# Altium PCB Obscurum-MB_1a.PcbDoc
Units mm, origin at the board's own origin, x right, y up, seen from the top; angles counter-clockwise.
Board outline 100 x 100 mm, 2 copper layers (Top Layer, Bottom Layer), stack 1.535 mm thick; 144 components, 92 nets, 337 pads, 30 vias.
Unrouted connection lines stored in the file: 158.
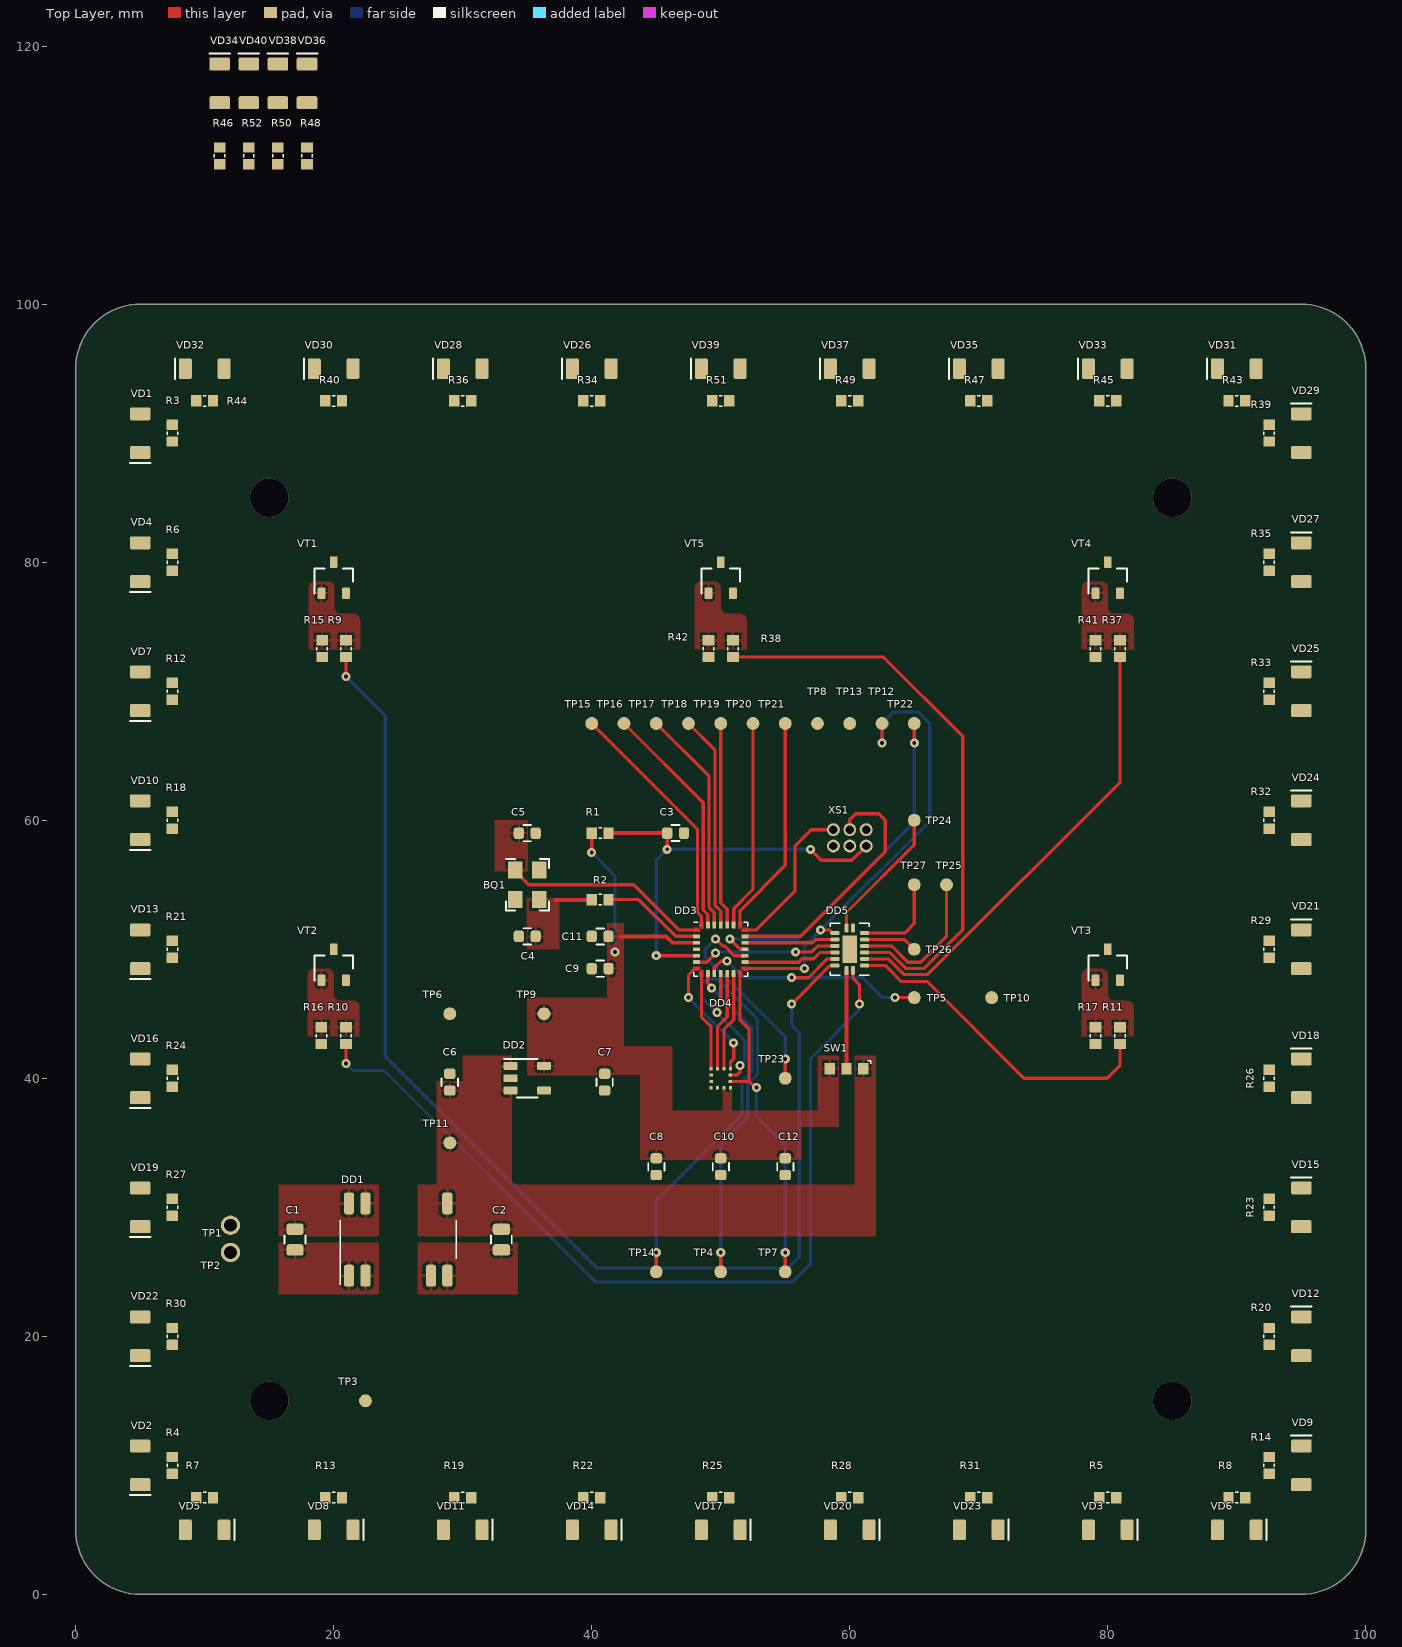
[diagram p0: Top Layer view]
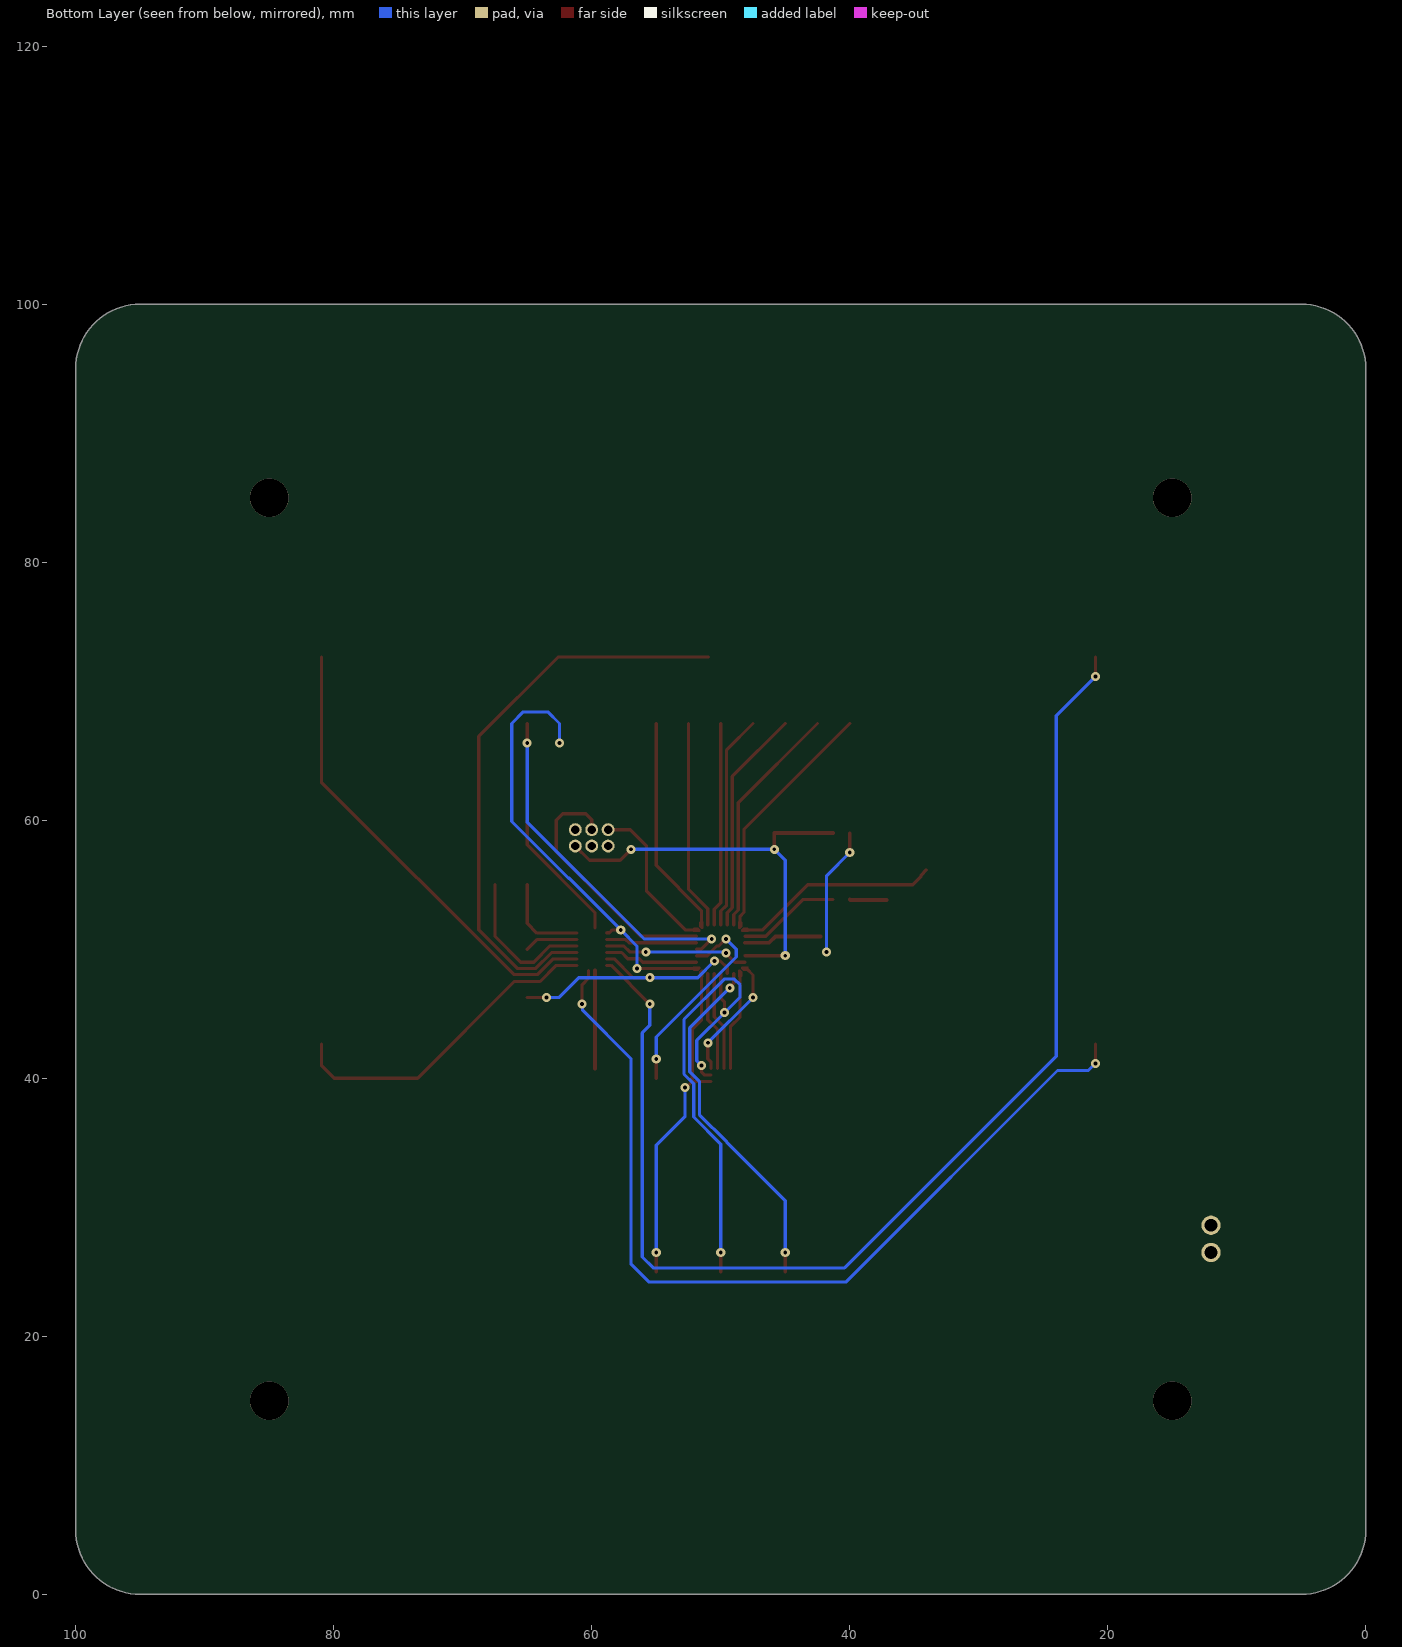
[diagram p1: Bottom Layer view, seen from below]

## Layer stack, top to bottom
Top Solder: solder mask 0.0254, SM-001, Dk 4
Top Layer: signal copper 0.018
Dielectric 1: core 1.4986, Core-043, Dk 4.3
Bottom Layer: signal copper 0.018
Bottom Solder: solder mask 0.0254, SM-001, Dk 4

## Board outline
0,5 ccw(c5,5) 5,0 95,0 ccw(c95,5) 100,5 100,95 ccw(c95,95) 95,100 5,100 ccw(c5,95) 0,95

## Design rules (kind name [scope] priority, off if disabled: settings)
AcuteAngle [All] p1: minimum=3.50000000000000E+0001 checktracksonly=FALSE
BoardOutlineClearance "BoardOutlineClearance 1" [All] p1: gap=0.25 ignorepadtopadclearanceinfootprint=FALSE except(0: Arc-SplitContinuation Track-SplitContinuation SMDPad-SplitContinuation THPad-SplitContinuation Via-SplitContinuation Fill-SplitContinuation Poly-SplitContinuation Region-SplitContinuation Text-SplitContinuation) // Milling
BoardOutlineClearance "BoardOutlineClearance 2" [All] p2: gap=0.4 ignorepadtopadclearanceinfootprint=FALSE except(0: Arc-SplitContinuation Track-SplitContinuation SMDPad-SplitContinuation THPad-SplitContinuation Via-SplitContinuation Fill-SplitContinuation Poly-SplitContinuation Region-SplitContinuation Text-SplitContinuation) // V-Cut
Clearance "Clearance-1 1 Oz" [All] p1: gap=0.2 ignorepadtopadclearanceinfootprint=TRUE except(0.25: Arc-Hole Track-Hole SMDPad-Hole THPad-Hole Via-Hole Fill-Hole Poly-Hole Region-Hole Text-Hole) // Standart
Clearance "Clearance-1 1/2 Oz" [All] p2: gap=0.125 ignorepadtopadclearanceinfootprint=FALSE except(0.2: Arc-Fill Arc-Poly Track-Fill Track-Poly SMDPad-SMDPad SMDPad-Fill SMDPad-Poly THPad-Fill THPad-Poly Via-Fill Via-Poly Fill-Fill Fill-Poly Poly-Poly Poly-Region Poly-Text; 0.25: Arc-Hole Track-Hole SMDPad-Hole THPad-Hole Via-Hole Fill-Hole Poly-Hole Region-Hole Text-Hole) // Standart
ComponentClearance [All] p1: gap=0.254 collisioncheckmode=3 verticalgap=0.254 showdistances=FALSE donotcheckwithout3dbody=TRUE
DiffPairsRouting "DiffPairsRouting 1 Oz" [All] p1: maxlimit=0.254 minlimit=0.2 mostfreqgap=0.254 toplayer_minwidth=0.2 toplayer_maxwidth=0.381 toplayer_prefwidth=0.381 bottomlayer_minwidth=0.2 bottomlayer_maxwidth=0.381 bottomlayer_prefwidth=0.381 maxuncoupledlength=12.7
DiffPairsRouting "DiffPairsRouting 1/2 Oz" [All] p2: maxlimit=0.254 minlimit=0.1 mostfreqgap=0.254 toplayer_minwidth=0.1 toplayer_maxwidth=0.381 toplayer_prefwidth=0.381 bottomlayer_minwidth=0.1 bottomlayer_maxwidth=0.381 bottomlayer_prefwidth=0.381 maxuncoupledlength=12.7
HoleSize "Minimum HoleSize" [IsPad] p1: absolutevalues=TRUE maxlimit=5.9 minlimit=0.6 maxpercent=80.000 minpercent=20.000
HoleSize "Minimum HoleSize VIA 1" [IsVia] p2: absolutevalues=TRUE maxlimit=5.9 minlimit=0.3 maxpercent=80.000 minpercent=20.000 // Standart
HoleToHoleClearance Hole2HoleClearance [All] p1: gap=0.25 allowstackedmicrovias=FALSE
MinimumAnnularRing "Minimum AR VIA Standart" [IsVia] p1: minimumring=0.15
MinimumAnnularRing "Minimum AR PAD Standart" [IsPAD] p2: minimumring=0.2
MinimumAnnularRing "Minimum AR VIA Advance" [IsVia] p3: minimumring=0.1
MinimumAnnularRing "Minimum AR PAD Advance" [IsPAD] p4: minimumring=0.15
MinimumSolderMaskSliver "SolderMask Bridge Standart" [All] p1: minsoldermaskwidth=0.15 // All Masks
MinimumSolderMaskSliver "SolderMask Bridge Advance" [All] p2: minsoldermaskwidth=0.1 // Mask LDI
PlaneClearance "PlaneClearance 1 Oz" [All] p1: clearance=0.2
PlaneClearance "PlaneClearance-1 1/2 Oz" [All] p2: clearance=0.2 // Standart
PlaneConnect "TermalConnect-1 1 Oz" [All] p1: planeconnectstyle=Relief reliefexpansion=0.2 reliefentries=4 reliefconductorwidth=0.2 reliefairgap=0.2 // Standart
PolygonConnect "PolygonConnect-1 1 Oz" [All] p1: thpad.connectstyle=Relief thpad.reliefconductorwidth=0.2 thpad.reliefentries=4 thpad.polygonreliefangle="90 Angle" thpad.airgapwidth=0.2 smdpad.connectstyle=Relief smdpad.reliefconductorwidth=0.2 smdpad.reliefentries=4 smdpad.polygonreliefangle="90 Angle" smdpad.airgapwidth=0.2 via.connectstyle=Direct via.reliefconductorwidth=0.254 via.reliefentries=4 via.polygonreliefangle="90 Angle" via.airgapwidth=0.254 // Standart
PolygonConnect "PolygonConnect-1 1/2 Oz" [All] p2: thpad.connectstyle=Relief thpad.reliefconductorwidth=0.15 thpad.reliefentries=4 thpad.polygonreliefangle="90 Angle" thpad.airgapwidth=0.2 smdpad.connectstyle=Relief smdpad.reliefconductorwidth=0.2 smdpad.reliefentries=4 smdpad.polygonreliefangle="90 Angle" smdpad.airgapwidth=0.2 via.connectstyle=Direct via.reliefconductorwidth=0.254 via.reliefentries=4 via.polygonreliefangle="90 Angle" via.airgapwidth=0.254 // Standart
RoutingCorners [All] p1 off: cornerstyle=45-Degree minsetback=2.54 maxsetback=2.54
RoutingVias [All] p1: holewidth=0.3 width=0.6 viastyle="Through Hole" minholewidth=0.2 minwidth=0.4 maxholewidth=5.9 maxwidth=6.4
SilkToSilkClearance Silk2SilkClearance [All] p1 off: silktosilkclearance=0.15
SilkToSolderMaskClearance Silk2SolderMaskClearance [IsPad] p1 off: minsilkscreentomaskgap=0.15 clearancetoexposedcopper=TRUE
SolderMaskExpansion SolderMaskExpansion-1 [All] p1: expansion=0.05 istentingtop=FALSE // Standart
SolderMaskExpansion "SolderMaskExpansion LDI" [All] p2: expansion=0.025 istentingtop=FALSE // Advance
UnRoutedNet [All] p1: checkbadconnections=TRUE
Width "Width 1 Oz" [All] p1: maxlimit=10 minlimit=0.15 preferedwidth=0.2 checkconnectedcopper=TRUE
Width "Width 1/2 Oz" [All] p2: maxlimit=10 minlimit=0.1 preferedwidth=0.125 checkconnectedcopper=TRUE
19 further rules are at their usual default settings.

## Classes and differential pairs
component class Obscurum-MB_1a: BQ1 C1 C2 C3 C4 C5 C6 C7 C8 C9 C10 C11 C12 DD1 DD2 DD3 DD4 R1 R2 TP1 TP2 TP3 TP4 TP5 TP6 TP7 TP8 TP9 TP10 TP11 TP12 TP13 TP14 TP15 TP16 TP17 TP18 TP19 TP20 TP21 TP22 TP23 XS1
component class LED: DD5 R3 R4 R5 R6 R7 R8 R9 R10 R11 R12 R13 R14 R15 R16 R17 R18 R19 R20 R21 R22 R23 R24 R25 R26 R27 R28 R29 R30 R31 R32 R33 R34 R35 R36 R37 R38 R39 R40 R41 R42 R43 R44 R45 R46 R47 R48 R49 R50 R51 R52 SW1 TP24 TP25 TP26 TP27 VD1 VD2 VD3 VD4 VD5 VD6 VD7 VD8 VD9 VD10 VD11 VD12 VD13 VD14 VD15 VD16 VD17 VD18 VD19 VD20 VD21 VD22 VD23 VD24 VD25 VD26 VD27 VD28 VD29 VD30 VD31 VD32 VD33 VD34 VD35 VD36 VD37 VD38 VD39 VD40 VT1 VT2 VT3 VT4 VT5

## Components (designator, comment, footprint, x,y, rotation, side; value= is the part's Value field where it differs from the comment)
BQ1 "SMD3225-16.000MHz" "OSC: 3225" 35,55 r270 top
C1 "Ceramic capacitor, 4.7u, X7R, ±10%, 50V, 0805, -55...+125°C" "CAP: 0805" 17,27.5 r90 top value=4.7u
C2 "Ceramic capacitor, 10u, X7R, ±10%, 50V, 0805, -55...+125°C" "CAP: 0805" 33,27.5 r90 top value=10u
C3 "Ceramic capacitor, 0.1uF, X7R, ±10%, 16V, 0603, -55...+125°C" "CAP: 0603" 46.5,59 r180 top value=0.1uF
C4 "0603   20 пФ ± 10 % X7R 10В" "CAP: 0603" 35,51 r180 top value=20p
C5 "0603   20 пФ ± 10 % X7R 10В" "CAP: 0603" 35,59 r0 top value=20p
C6 "0603   1 мкФ ± 10 % X7R 16В" "CAP: 0603" 29,39.7 r270 top value=1u
C7 "0603   1 мкФ ± 10 % X7R 16В" "CAP: 0603" 41,39.7 r90 top value=1u
C8 "Ceramic capacitor, 0.1uF, X7R, ±10%, 16V, 0603, -55...+125°C" "CAP: 0603" 45,33.15 r90 top value=0.1uF
C9 "Ceramic capacitor, 0.1uF, X7R, ±10%, 16V, 0603, -55...+125°C" "CAP: 0603" 40.65,48.5 r0 top value=0.1uF
C10 "Ceramic capacitor, 0.1uF, X7R, ±10%, 16V, 0603, -55...+125°C" "CAP: 0603" 50,33.15 r90 top value=0.1uF
C11 "Ceramic capacitor, 4.7u, X7R, ±10%, 16V, 0603, -55...+125°C" "CAP: 0603" 40.65,51 r0 top value=4.7u
C12 "Ceramic capacitor, 10uF, X7R, ±10%, 16V, 0603, -55...+125°C" "CAP: 0603" 55,33.15 r90 top value=10uF
DD1 "B0505MT-1WR4" B0505MT-1WR4 25,27.5 r90 top
DD2 "LP5907MFX-3.3" SOT23-5 35,40 r0 top
DD3 "STM32G031G8U6" 28-UFQFPN 50,50 r0 top locked
DD4 "LIS2DH12TR" 12-LGA 50,40 r270 top
DD5 "74HC595BQ" 16-DHVQFN 60,50 r180 top
R1 "Resistor film, 10k, , 0603, 0.1W, -55...+125°C" "RES: 0603" 40.65,59 r180 top value=10k
R2 "0603 62 Ом ± 5 %" "RES: 0603" 40.65,53.85 r180 top value=62
R3 "Resistor film, 150, , 0603, 0.1W, -55...+125°C" "RES: 0603" 7.5,90 r270 top value=150
R4 "Resistor film, 150, , 0603, 0.1W, -55...+125°C" "RES: 0603" 7.5,10 r270 top value=150
R5 "Resistor film, 150, , 0603, 0.1W, -55...+125°C" "RES: 0603" 80,7.5 r0 top value=150
R6 "Resistor film, 150, , 0603, 0.1W, -55...+125°C" "RES: 0603" 7.5,80 r270 top value=150
R7 "Resistor film, 150, , 0603, 0.1W, -55...+125°C" "RES: 0603" 10,7.5 r0 top value=150
R8 "Resistor film, 150, , 0603, 0.1W, -55...+125°C" "RES: 0603" 90,7.5 r0 top value=150
R9 "Resistor film, 100, , 0603, 0.1W, -55...+125°C" "RES: 0603" 20.95,73.3 r90 top value=100
R10 "Resistor film, 100, , 0603, 0.1W, -55...+125°C" "RES: 0603" 20.95,43.3 r90 top value=100
R11 "Resistor film, 100, , 0603, 0.1W, -55...+125°C" "RES: 0603" 80.95,43.3 r90 top value=100
R12 "Resistor film, 150, , 0603, 0.1W, -55...+125°C" "RES: 0603" 7.5,70 r270 top value=150
R13 "Resistor film, 150, , 0603, 0.1W, -55...+125°C" "RES: 0603" 20,7.5 r0 top value=150
R14 "Resistor film, 150, , 0603, 0.1W, -55...+125°C" "RES: 0603" 92.5,10 r90 top value=150
R15 "Resistor film, 10k, , 0603, 0.1W, -55...+125°C" "RES: 0603" 19.1,73.3 r90 top value=10k
R16 "Resistor film, 10k, , 0603, 0.1W, -55...+125°C" "RES: 0603" 19.05,43.3 r90 top value=10k
R17 "Resistor film, 10k, , 0603, 0.1W, -55...+125°C" "RES: 0603" 79.05,43.3 r90 top value=10k
R18 "Resistor film, 150, , 0603, 0.1W, -55...+125°C" "RES: 0603" 7.5,60 r270 top value=150
R19 "Resistor film, 150, , 0603, 0.1W, -55...+125°C" "RES: 0603" 30,7.5 r0 top value=150
R20 "Resistor film, 150, , 0603, 0.1W, -55...+125°C" "RES: 0603" 92.5,20 r90 top value=150
R21 "Resistor film, 150, , 0603, 0.1W, -55...+125°C" "RES: 0603" 7.5,50 r270 top value=150
R22 "Resistor film, 150, , 0603, 0.1W, -55...+125°C" "RES: 0603" 40,7.5 r0 top value=150
R23 "Resistor film, 150, , 0603, 0.1W, -55...+125°C" "RES: 0603" 92.5,30 r90 top value=150
R24 "Resistor film, 150, , 0603, 0.1W, -55...+125°C" "RES: 0603" 7.5,40 r270 top value=150
R25 "Resistor film, 150, , 0603, 0.1W, -55...+125°C" "RES: 0603" 50,7.5 r0 top value=150
R26 "Resistor film, 150, , 0603, 0.1W, -55...+125°C" "RES: 0603" 92.5,40 r90 top value=150
R27 "Resistor film, 150, , 0603, 0.1W, -55...+125°C" "RES: 0603" 7.5,30 r270 top value=150
R28 "Resistor film, 150, , 0603, 0.1W, -55...+125°C" "RES: 0603" 60,7.5 r0 top value=150
R29 "Resistor film, 150, , 0603, 0.1W, -55...+125°C" "RES: 0603" 92.5,50 r90 top value=150
R30 "Resistor film, 150, , 0603, 0.1W, -55...+125°C" "RES: 0603" 7.5,20 r270 top value=150
R31 "Resistor film, 150, , 0603, 0.1W, -55...+125°C" "RES: 0603" 70,7.5 r0 top value=150
R32 "Resistor film, 150, , 0603, 0.1W, -55...+125°C" "RES: 0603" 92.5,60 r90 top value=150
R33 "Resistor film, 150, , 0603, 0.1W, -55...+125°C" "RES: 0603" 92.5,70 r90 top value=150
R34 "Resistor film, 150, , 0603, 0.1W, -55...+125°C" "RES: 0603" 40,92.5 r180 top value=150
R35 "Resistor film, 150, , 0603, 0.1W, -55...+125°C" "RES: 0603" 92.5,80 r90 top value=150
R36 "Resistor film, 150, , 0603, 0.1W, -55...+125°C" "RES: 0603" 30,92.5 r180 top value=150
R37 "Resistor film, 100, , 0603, 0.1W, -55...+125°C" "RES: 0603" 80.95,73.3 r90 top value=100
R38 "Resistor film, 100, , 0603, 0.1W, -55...+125°C" "RES: 0603" 50.95,73.3 r90 top value=100
R39 "Resistor film, 150, , 0603, 0.1W, -55...+125°C" "RES: 0603" 92.5,90 r90 top value=150
R40 "Resistor film, 150, , 0603, 0.1W, -55...+125°C" "RES: 0603" 20,92.5 r180 top value=150
R41 "Resistor film, 10k, , 0603, 0.1W, -55...+125°C" "RES: 0603" 79.05,73.3 r90 top value=10k
R42 "Resistor film, 10k, , 0603, 0.1W, -55...+125°C" "RES: 0603" 49.05,73.3 r90 top value=10k
R43 "Resistor film, 150, , 0603, 0.1W, -55...+125°C" "RES: 0603" 90,92.5 r180 top value=150
R44 "Resistor film, 150, , 0603, 0.1W, -55...+125°C" "RES: 0603" 10,92.5 r180 top value=150
R45 "Resistor film, 150, , 0603, 0.1W, -55...+125°C" "RES: 0603" 80,92.5 r180 top value=150
R46 "Resistor film, 150, , 0603, 0.1W, -55...+125°C" "RES: 0603" 11.161,111.5 r270 top value=150
R47 "Resistor film, 150, , 0603, 0.1W, -55...+125°C" "RES: 0603" 70,92.5 r180 top value=150
R48 "Resistor film, 150, , 0603, 0.1W, -55...+125°C" "RES: 0603" 17.935,111.5 r270 top value=150
R49 "Resistor film, 150, , 0603, 0.1W, -55...+125°C" "RES: 0603" 60,92.5 r180 top value=150
R50 "Resistor film, 150, , 0603, 0.1W, -55...+125°C" "RES: 0603" 15.677,111.5 r270 top value=150
R51 "Resistor film, 150, , 0603, 0.1W, -55...+125°C" "RES: 0603" 50,92.5 r180 top value=150
R52 "Resistor film, 150, , 0603, 0.1W, -55...+125°C" "RES: 0603" 13.419,111.5 r270 top value=150
SW1 "Jumper" "JUM: 0603_3P" 60.4,40.75 r180 top
TP1 "Testpoint_HS1mm" "TestPoint(without 3D)" 12,28.608 r270 top
TP2 "Testpoint_HS1mm" "TestPoint(without 3D)" 12,26.5 r270 top
TP3 "Testpoint_HS1mm" "TestPoint(without hole)" 22.46,15 r0 top
TP4 "Testpoint_HS1mm" "TestPoint(without hole)" 50,25 r0 top
TP5 "Testpoint_HS1mm" "TestPoint(without hole)" 65,46.25 r180 top
TP6 "Testpoint_HS1mm" "TestPoint(without hole)" 29,45 r0 top
TP7 "Testpoint_HS1mm" "TestPoint(without hole)" 55,25 r0 top
TP8 "Testpoint_HS1mm" "TestPoint(without hole)" 57.5,67.5 r180 top
TP9 "Testpoint_HS1mm" "TestPoint(without hole)" 36.3,45 r0 top
TP10 "Testpoint_HS1mm" "TestPoint(without hole)" 71,46.25 r0 top
TP11 "Testpoint_HS1mm" "TestPoint(without hole)" 29,35 r0 top
TP12 "Testpoint_HS1mm" "TestPoint(without hole)" 62.5,67.5 r0 top
TP13 "Testpoint_HS1mm" "TestPoint(without hole)" 60,67.5 r180 top
TP14 "Testpoint_HS1mm" "TestPoint(without hole)" 45,25 r0 top
TP15 "Testpoint_HS1mm" "TestPoint(without hole)" 40,67.5 r0 top
TP16 "Testpoint_HS1mm" "TestPoint(without hole)" 42.5,67.5 r0 top
TP17 "Testpoint_HS1mm" "TestPoint(without hole)" 45,67.5 r0 top
TP18 "Testpoint_HS1mm" "TestPoint(without hole)" 47.5,67.5 r0 top
TP19 "Testpoint_HS1mm" "TestPoint(without hole)" 50,67.5 r0 top
TP20 "Testpoint_HS1mm" "TestPoint(without hole)" 52.5,67.5 r0 top
TP21 "Testpoint_HS1mm" "TestPoint(without hole)" 55,67.5 r0 top
TP22 "Testpoint_HS1mm" "TestPoint(without hole)" 65,67.5 r0 top
TP23 "Testpoint_HS1mm" "TestPoint(without hole)" 55,40 r0 top
TP24 "Testpoint_HS1mm" "TestPoint(without hole)" 65,60 r0 top
TP25 "Testpoint_HS1mm" "TestPoint(without hole)" 67.5,55 r0 top
TP26 "Testpoint_HS1mm" "TestPoint(without hole)" 65,50 r0 top
TP27 "Testpoint_HS1mm" "TestPoint(without hole)" 65,55 r0 top
VD1 "LED, Green, *, *, *, -55...+150°C" "LED: 1206Y" 5,90 r270 top
VD2 "LED, Green, *, *, *, -55...+150°C" "LED: 1206Y" 5,10 r270 top
VD3 "LED, Green, *, *, *, -55...+150°C" "LED: 1206Y" 80,5 r0 top
VD4 "LED, Green, *, *, *, -55...+150°C" "LED: 1206Y" 5,80 r270 top
VD5 "LED, Green, *, *, *, -55...+150°C" "LED: 1206Y" 10,5 r0 top
VD6 "LED, Green, *, *, *, -55...+150°C" "LED: 1206Y" 90,5 r0 top
VD7 "LED, Green, *, *, *, -55...+150°C" "LED: 1206Y" 5,70 r270 top
VD8 "LED, Green, *, *, *, -55...+150°C" "LED: 1206Y" 20,5 r0 top
VD9 "LED, Green, *, *, *, -55...+150°C" "LED: 1206Y" 95,10 r90 top
VD10 "LED, Green, *, *, *, -55...+150°C" "LED: 1206Y" 5,60 r270 top
VD11 "LED, Green, *, *, *, -55...+150°C" "LED: 1206Y" 30,5 r0 top
VD12 "LED, Green, *, *, *, -55...+150°C" "LED: 1206Y" 95,20 r90 top
VD13 "LED, Green, *, *, *, -55...+150°C" "LED: 1206Y" 5,50 r270 top
VD14 "LED, Green, *, *, *, -55...+150°C" "LED: 1206Y" 40,5 r0 top
VD15 "LED, Green, *, *, *, -55...+150°C" "LED: 1206Y" 95,30 r90 top
VD16 "LED, Green, *, *, *, -55...+150°C" "LED: 1206Y" 5,40 r270 top
VD17 "LED, Green, *, *, *, -55...+150°C" "LED: 1206Y" 50,5 r0 top
VD18 "LED, Green, *, *, *, -55...+150°C" "LED: 1206Y" 95,40 r90 top
VD19 "LED, Green, *, *, *, -55...+150°C" "LED: 1206Y" 5,30 r270 top
VD20 "LED, Green, *, *, *, -55...+150°C" "LED: 1206Y" 60,5 r0 top
VD21 "LED, Green, *, *, *, -55...+150°C" "LED: 1206Y" 95,50 r90 top
VD22 "LED, Green, *, *, *, -55...+150°C" "LED: 1206Y" 5,20 r270 top
VD23 "LED, Green, *, *, *, -55...+150°C" "LED: 1206Y" 70,5 r0 top
VD24 "LED, Green, *, *, *, -55...+150°C" "LED: 1206Y" 95,60 r90 top
VD25 "LED, Green, *, *, *, -55...+150°C" "LED: 1206Y" 95,70 r90 top
VD26 "LED, Green, *, *, *, -55...+150°C" "LED: 1206Y" 40,95 r180 top
VD27 "LED, Green, *, *, *, -55...+150°C" "LED: 1206Y" 95,80 r90 top
VD28 "LED, Green, *, *, *, -55...+150°C" "LED: 1206Y" 30,95 r180 top
VD29 "LED, Green, *, *, *, -55...+150°C" "LED: 1206Y" 95,90 r90 top
VD30 "LED, Green, *, *, *, -55...+150°C" "LED: 1206Y" 20,95 r180 top
VD31 "LED, Green, *, *, *, -55...+150°C" "LED: 1206Y" 90,95 r180 top
VD32 "LED, Green, *, *, *, -55...+150°C" "LED: 1206Y" 10,95 r180 top
VD33 "LED, Green, *, *, *, -55...+150°C" "LED: 1206Y" 80,95 r180 top
VD34 "LED, Green, *, *, *, -55...+150°C" "LED: 1206Y" 11.161,117.117 r90 top
VD35 "LED, Green, *, *, *, -55...+150°C" "LED: 1206Y" 70,95 r180 top
VD36 "LED, Green, *, *, *, -55...+150°C" "LED: 1206Y" 17.935,117.117 r90 top
VD37 "LED, Green, *, *, *, -55...+150°C" "LED: 1206Y" 60,95 r180 top
VD38 "LED, Green, *, *, *, -55...+150°C" "LED: 1206Y" 15.677,117.117 r90 top
VD39 "LED, Green, *, *, *, -55...+150°C" "LED: 1206Y" 50,95 r180 top
VD40 "LED, Green, *, *, *, -55...+150°C" "LED: 1206Y" 13.419,117.117 r90 top
VT1 "MOSFET N-channel transistor, 80V, 7A, 9.1nC, 2.5W, 34mOhm, 756pF, 8-TDSON, -55...+150°C" SOT23 20,78.8 r90 top
VT2 "MOSFET N-channel transistor, 80V, 7A, 9.1nC, 2.5W, 34mOhm, 756pF, 8-TDSON, -55...+150°C" SOT23 20,48.8 r90 top
VT3 "MOSFET N-channel transistor, 80V, 7A, 9.1nC, 2.5W, 34mOhm, 756pF, 8-TDSON, -55...+150°C" SOT23 80,48.8 r90 top
VT4 "MOSFET N-channel transistor, 80V, 7A, 9.1nC, 2.5W, 34mOhm, 756pF, 8-TDSON, -55...+150°C" SOT23 80,78.8 r90 top
VT5 "MOSFET N-channel transistor, 80V, 7A, 9.1nC, 2.5W, 34mOhm, 756pF, 8-TDSON, -55...+150°C" SOT23 50,78.8 r90 top
XS1 "PBD 1.27-6R" "CON: PLLD-6R(1.27)" 58.73,57.995 r0 top

## Footprints (in the part's own frame and the unit in brackets; to place one, negate y for a bottom-side part, rotate by r counter-clockwise, add the part's x,y. Pads: shape width x height; smd on the part's side, far side on the other; paste and mask are expansions set on the pad)
12-LGA [mm]
  rect 0.275x0.25 smd: 1(-0.75,0.75) 2(-0.75,0.25) 3(-0.75,-0.25) 4(-0.75,-0.75) 7(0.75,-0.75) 8(0.75,-0.25) 9(0.75,0.25) 10(0.75,0.75)
  rect 0.25x0.275 smd: 5(-0.25,-0.75) 6(0.25,-0.75) 11(0.25,0.75) 12(-0.25,0.75)
  body extent -1,-1 1,1, height 0.95
16-DHVQFN [mm]
  rrect50% 0.3x0.7 smd: 1(-0.25,1.65) 8(-0.25,-1.65) 9(0.25,-1.65) 16(0.25,1.65)
  rrect50% 0.7x0.3 smd: 2(-1.15,1.25) 3(-1.15,0.75) 4(-1.15,0.25) 5(-1.15,-0.25) 6(-1.15,-0.75) 7(-1.15,-1.25) 10(1.15,-1.25) 11(1.15,-0.75) 12(1.15,-0.25) 13(1.15,0.25) 14(1.15,0.75) 15(1.15,1.25)
  rect 1.15x2.15 smd: 8(0,0)
  silkscreen extent -1.5,-2 1.5,2, body extent -1.25,-1.75 1.25,1.75, height 0.85
28-UFQFPN [mm]
  round 0.025 smd: 1(-1.875,1.5) 7(-1.875,-1.5) 8(-1.5,-1.875) 14(1.5,-1.875) 15(1.875,-1.5) 21(1.875,1.5) 22(1.5,1.875) 28(-1.5,1.875)
  rrect50% 0.55x0.3 smd: 2(-1.875,1) 3(-1.875,0.5) 4(-1.875,0) 5(-1.875,-0.5) 6(-1.875,-1) 16(1.875,-1) 17(1.875,-0.5) 18(1.875,0) 19(1.875,0.5) 20(1.875,1)
  rrect50% 0.3x0.55 smd: 9(-1,-1.875) 10(-0.5,-1.875) 11(0,-1.875) 12(0.5,-1.875) 13(1,-1.875) 23(1,1.875) 24(0.5,1.875) 25(0,1.875) 26(-0.5,1.875) 27(-1,1.875)
  Top Layer region: 1.425,2.15 1.575,2.15 1.575,2.15 1.604,2.144 1.628,2.128 1.644,2.104 1.65,2.075 1.65,2.075 1.65,2.075 1.65,1.75 1.5,1.6 1.425,1.6 1.425,1.6 1.396,1.606 1.372,1.622 1.356,1.646 1.35,1.675 1.35,1.675 1.35,2.075 1.356,2.104 1.372,2.128 1.396,2.144 1.425,2.15
  Top Layer region: 2.15,1.425 2.15,1.575 2.15,1.575 2.144,1.604 2.128,1.628 2.104,1.644 2.075,1.65 2.075,1.65 2.075,1.65 1.75,1.65 1.6,1.5 1.6,1.425 1.6,1.425 1.606,1.396 1.622,1.372 1.646,1.356 1.675,1.35 1.675,1.35 2.075,1.35 2.104,1.356 2.128,1.372 2.144,1.396 2.15,1.425
  Top Layer region: 2.15,-1.425 2.15,-1.575 2.15,-1.575 2.144,-1.604 2.128,-1.628 2.104,-1.644 2.075,-1.65 2.075,-1.65 2.075,-1.65 1.75,-1.65 1.6,-1.5 1.6,-1.425 1.6,-1.425 1.606,-1.396 1.622,-1.372 1.646,-1.356 1.675,-1.35 1.675,-1.35 2.075,-1.35 2.104,-1.356 2.128,-1.372 2.144,-1.396 2.15,-1.425
  Top Layer region: 1.425,-2.15 1.575,-2.15 1.575,-2.15 1.604,-2.144 1.628,-2.128 1.644,-2.104 1.65,-2.075 1.65,-2.075 1.65,-2.075 1.65,-1.75 1.5,-1.6 1.425,-1.6 1.425,-1.6 1.396,-1.606 1.372,-1.622 1.356,-1.646 1.35,-1.675 1.35,-1.675 1.35,-2.075 1.356,-2.104 1.372,-2.128 1.396,-2.144 1.425,-2.15
  Top Layer region: -2.15,-1.425 -2.15,-1.575 -2.15,-1.575 -2.144,-1.604 -2.128,-1.628 -2.104,-1.644 -2.075,-1.65 -2.075,-1.65 -2.075,-1.65 -1.75,-1.65 -1.6,-1.5 -1.6,-1.425 -1.6,-1.425 -1.606,-1.396 -1.622,-1.372 -1.646,-1.356 -1.675,-1.35 -1.675,-1.35 -2.075,-1.35 -2.104,-1.356 -2.128,-1.372 -2.144,-1.396 -2.15,-1.425
  Top Layer region: -1.425,-2.15 -1.575,-2.15 -1.575,-2.15 -1.604,-2.144 -1.628,-2.128 -1.644,-2.104 -1.65,-2.075 -1.65,-2.075 -1.65,-2.075 -1.65,-1.75 -1.5,-1.6 -1.425,-1.6 -1.425,-1.6 -1.396,-1.606 -1.372,-1.622 -1.356,-1.646 -1.35,-1.675 -1.35,-1.675 -1.35,-2.075 -1.356,-2.104 -1.372,-2.128 -1.396,-2.144 -1.425,-2.15
  Top Layer region: -1.425,2.15 -1.575,2.15 -1.575,2.15 -1.604,2.144 -1.628,2.128 -1.644,2.104 -1.65,2.075 -1.65,2.075 -1.65,2.075 -1.65,1.75 -1.5,1.6 -1.425,1.6 -1.425,1.6 -1.396,1.606 -1.372,1.622 -1.356,1.646 -1.35,1.675 -1.35,1.675 -1.35,2.075 -1.356,2.104 -1.372,2.128 -1.396,2.144 -1.425,2.15
  Top Layer region: -2.15,1.425 -2.15,1.575 -2.15,1.575 -2.144,1.604 -2.128,1.628 -2.104,1.644 -2.075,1.65 -2.075,1.65 -2.075,1.65 -1.75,1.65 -1.6,1.5 -1.6,1.425 -1.6,1.425 -1.606,1.396 -1.622,1.372 -1.646,1.356 -1.675,1.35 -1.675,1.35 -2.075,1.35 -2.104,1.356 -2.128,1.372 -2.144,1.396 -2.15,1.425
  silkscreen extent -2.1,-2.1 2.1,2.1, body extent -2.01,-2.02 2.01,2, height 0.55
B0505MT-1WR4 [mm]
  rrect50% 1.7x0.8 smd: 1(-2.8,3.81) 2(-2.8,2.54) 6(-2.8,-2.54) 7(-2.8,-3.81) 8(2.8,-3.81) 13(2.8,2.54) 14(2.8,3.81)
  silkscreen extent -3.5,-4.5 1.5,4.5, body extent -3.5,-4.5 3.5,4.5, height 3.1
"CAP: 0603" [mm]
  rrect50% 0.8x0.9 smd: 1(-0.65,0) 2(0.65,0)
  silkscreen extent -0.3,-0.63 0.3,0.62, body extent -0.78,-0.43 0.83,0.44, height 0.8
"CAP: 0805" [mm]
  rrect50% 0.9x1.35 smd: 1(-0.8,0) 2(0.8,0)
  silkscreen extent -0.33,-0.8 0.33,0.8, body extent -1,-0.62 1,0.63, height 0.78
"CON: PLLD-6R(1.27)" [mm]
  round 1 hole 0.65: 1(0,0.005) 2(0,1.275) 3(1.27,0.005) 4(1.27,1.275) 5(2.54,0.005) 6(2.54,1.275)
"JUM: 0603_3P" [mm]
  rect 0.8x0.9 smd: 1(-0.65,0) 2(0.65,0) 3(1.95,0)
  silkscreen extent -1.22,-0.63 -0.97,-0.37
"LED: 1206Y" [mm]
  rrect25% 1x1.6 smd: 1(-1.5,0) 2(1.5,0)
  silkscreen extent 2.3,-0.8 2.3,0.8, body extent -1.65,-0.81 1.55,0.79, height 1.1
"OSC: 3225" [mm]
  rect 1.3x1.1 smd: 1(-1.15,-0.925) 2(1.15,-0.925) 3(1.15,0.925) 4(-1.15,0.925)
  silkscreen extent -2,-1.65 2,1.7, body extent -1.6,-1.25 1.6,1.25, height 0.81
"RES: 0603" [mm]
  rect 0.8x0.9 smd: 1(-0.65,0) 2(0.65,0)
  silkscreen extent -0.13,-0.4 0.13,0.4, body extent -0.8,-0.4 0.8,0.4, height 0.44
SOT23 [mm]
  rrect25% 0.9x0.6 smd: 1(-1.2,0.95) 2(-1.2,-0.95) 3(1.2,0)
  silkscreen extent -1.21,-1.5 0.7,1.5, body extent -1.32,-1.52 1.32,1.52, height 1.12
SOT23-5 [mm] "pitch 0.95 mm"
  rrect25% 1.1x0.6 smd: 1(-1.3,0.95) 2(-1.3,0) 3(-1.3,-0.95) 4(1.3,-0.95) 5(1.3,0.95)
  round 0.5 on Mech13: ""(-1.1,1.1)
  silkscreen extent -1.8,-1.5 0.8,1.5, body extent -1.5,-1.5 1.5,1.5, height 1.3
"TestPoint(without 3D)" [mm]
  round 1.5 hole 1: 1(0,0)
"TestPoint(without hole)" [mm]
  round 1 smd: 1(0,0)

## Part data
BQ1: library part Crystal_3225, "Resonator", Frequency=16MHz, LoadCapacitance=12pF, Manufacturer="Diodes Incorporated", Package="case 3225", PartNumber=FL1000002, Temperature=-40...+85°C, Tolerance=±25ppm, ValueManufacturerPartNumber="Crystal, 16MHz, 12pF, ±25ppm, case 3225, -40...+85°C", HelpURL=https://www.digikey.com/product-detail/en/diodes-incorporated/FL1000002/FL1000002CT-ND/6042078, TypeOscilator=Crystal
C1 C2: library part Ceramic_0805, Manufacturer=Yageo, Package=0805, PartNumber=CC0805KRX7R7BB104, Temperature=-55...+125°C, Tolerance=±10%, TypeCapacitor="Ceramic capacitor", TypeDielectric=X7R, Voltage=50V, HelpURL=https://www.digikey.com/product-detail/en/yageo/CC0805KRX7R7BB104/311-1142-1-ND/303052
  C1: ValueManufacturerPartNumber="Ceramic capacitor, 4.7u, X7R, ±10%, 50V, 0805, -55...+125°C"
  C2: ValueManufacturerPartNumber="Ceramic capacitor, 10u, X7R, ±10%, 50V, 0805, -55...+125°C"
C3 C8 C9 C10 C11 C12: library part Ceramic_0603, Manufacturer=Yageo, Package=0603, PartNumber=CC0603KRX7R7BB104, Temperature=-55...+125°C, Tolerance=±10%, TypeCapacitor="Ceramic capacitor", TypeDielectric=X7R, Voltage=16V, HelpURL=https://www.digikey.com/product-detail/en/yageo/CC0603KRX7R7BB104/311-1088-1-ND/302998
  C3 C8 C9 C10: ValueManufacturerPartNumber="Ceramic capacitor, 0.1uF, X7R, ±10%, 16V, 0603, -55...+125°C"
  C11: ValueManufacturerPartNumber="Ceramic capacitor, 4.7u, X7R, ±10%, 16V, 0603, -55...+125°C"
  C12: ValueManufacturerPartNumber="Ceramic capacitor, 10uF, X7R, ±10%, 16V, 0603, -55...+125°C"
C4 C5: library part Ceramic_0603, "Capacitor", Manufacturer=Yageo, Package=0603, PartNumber=CC0603KRX7R7BB104, Temperature=-55...+125°C, Tolerance=±10%, TypeCapacitor="Ceramic capacitor", TypeDielectric=X7R, ValueManufacturerPartNumber="Ceramic capacitor, 20p, X7R, ±10%, 16V, 0603, -55...+125°C", Voltage=16V, HelpURL=https://www.digikey.com/product-detail/en/yageo/CC0603KRX7R7BB104/311-1088-1-ND/302998
C6 C7: library part Ceramic_0603, "Capacitor", Manufacturer=Yageo, Package=0603, PartNumber=CC0603KRX7R7BB104, Temperature=-55...+125°C, Tolerance=±10%, TypeCapacitor="Ceramic capacitor", TypeDielectric=X7R, ValueManufacturerPartNumber="Ceramic capacitor, 1u, X7R, ±10%, 16V, 0603, -55...+125°C", Voltage=16V, HelpURL=https://www.digikey.com/product-detail/en/yageo/CC0603KRX7R7BB104/311-1088-1-ND/302998
DD1: "Isolated DC-DC converter", ComponentLink1Description=Datasheet, ComponentLink1URL=https://www.mornsunpower.ru/html/pdf/B0505MT-1WR4.html
DD2: "LDO", ComponentLink1Description=Datasheet, ComponentLink1URL=https://www.ti.com/lit/ds/symlink/lp5907.pdf?ts=1629438025263&ref_url=https%253A%252F%252Fwww.google.com%252F
DD3: "Cortex-M0+", ComponentLink1Description=Documentation, ComponentLink1URL=https://www.st.com/en/microcontrollers-microprocessors/stm32g031g8.html
DD4: "MEMS accelerometer", ComponentLink1Description=Datasheet, ComponentLink1URL=https://estore.st.com/en/lis2dh12tr-cpn.html
R1 R3 R4 R5 R6 R7 R8 R9 R10 R11 R12 R13 R14 R15 R16 R17 R18 R19 R20 R21 R22 R23 R24 R25 R26 R27 R28 R29 R30 R31 R32 R33 R34 R35 R36 R37 R38 R39 R40 R41 R42 R43 R44 R45 R46 R47 R48 R49 R50 R51 R52: library part Resistor_0603, Manufacturer=Yageo, Package=0603, PartNumber=RC0603JR-07100RL, Power=0.1W, Temperature=-55...+125°C, TypeResistor="Resistor film", HelpURL=https://www.digikey.com/product-detail/en/yageo/RC0603JR-07100RL/311-100GRCT-ND/729644
  R1 R15 R16 R17 R41 R42: ValueManufacturerPartNumber="Resistor film, 10k, , 0603, 0.1W, -55...+125°C"
  R3 R4 R5 R6 R7 R8 R12 R13 R14 R18 R19 R20 R21 R22 R23 R24 R25 R26 R27 R28 R29 R30 R31 R32 R33 R34 R35 R36 R39 R40 R43 R44 R45 R46 R47 R48 R49 R50 R51 R52: ValueManufacturerPartNumber="Resistor film, 150, , 0603, 0.1W, -55...+125°C"
  R9 R10 R11 R37 R38: ValueManufacturerPartNumber="Resistor film, 100, , 0603, 0.1W, -55...+125°C"
R2: library part Resistor_0603, "Resistor", Manufacturer=Yageo, Package=0603, PartNumber=RC0603JR-07100RL, Power=0.1W, Temperature=-55...+125°C, Tolerance=±5%, TypeResistor="Resistor film", ValueManufacturerPartNumber="Resistor film, 62, ±5%, 0603, 0.1W, -55...+125°C", HelpURL=https://www.digikey.com/product-detail/en/yageo/RC0603JR-07100RL/311-100GRCT-ND/729644
SW1: "N/C"
VD1 VD2 VD3 VD4 VD5 VD6 VD7 VD8 VD9 VD10 VD11 VD12 VD13 VD14 VD15 VD16 VD17 VD18 VD19 VD20 VD21 VD22 VD23 VD24 VD25 VD26 VD27 VD28 VD29 VD30 VD31 VD32 VD33 VD34 VD35 VD36 VD37 VD38 VD39 VD40: library part LED_single, Color=GREEN, ColorParameter=Green, Temperature=-55...+150°C, TypeDiode=LED, ValueManufacturerPartNumber="LED, Green, *, *, *, -55...+150°C"
VT1 VT2 VT3 VT4 VT5: library part MOSFET_N_132, CurrentDS=7A, InputCapacitor=756pF, Manufacturer="Infineon Technologies", MaxPower=2.5W, Package=8-TDSON, PartNumber=2N7002, Temperature=-55...+150°C, VoltageDS=80V, GateCharge=9.1nC, HelpURL=https://www.digikey.com/product-detail/en/infineon-technologies/BSC340N08NS3GATMA1/BSC340N08NS3GATMA1TR-ND/2080655, RDS=34mOhm, TypeTransistor="MOSFET N-channel transistor", ValueManufacturerPartNumber="MOSFET N-channel transistor, 80V, 7A, 9.1nC, 2.5W, 34mOhm, 756pF, 8-TDSON, -55...+150°C"
XS1: "DS1065-14-2X3S8BR"
DD5: ComponentLink1Description=Information, ComponentLink1URL=https://www.nexperia.com/products/analog-logic-ics/logic/flip-flops-latches-registers-counters-dividers/shift-registers/74HC595BQ.html

## Free pads (board coordinates)
  round 3 hole 3 unplated: 0(15,15) 0(15,85) 0(85,15) 0(85,85)

## Via types
v1: diameter 0.7, hole 0.3, Top Layer to Bottom Layer, tented both sides, 30 vias

## Nets (pads, with @x,y where several pads share a name; then routed paths per layer and width w, separated by ;. In a path a pad name is that pad's centre, name@x,y a point inside that pad or via, vN(x,y) a via of type N, cw(c..) or ccw(c..) an arc to the next point about the centre after c; other vN are vias at no path point)
3V3: C7.2 C8.2 C9.2 C10.2 C11.2 C12.2 DD2.5 DD3.3 DD4.9 DD4.10 R1.2 SW1.3 TP9.1 XS1.1 | length 16
  Top Layer w0.25: v1(40,57.5) R1.2
  Top Layer w0.3: 42.25,51 45.75,51 46.25,50.5 DD3.3
  Bottom Layer w0.25: v1(40,57.5) 41.8,55.7 v1(41.8,49.8)
5V: C2.2 C6.2 DD1.8 DD2.1 DD2.3 R3.2 R4.2 R5.2 R6.2 R7.2 R8.2 R12.2 R13.2 R14.2 R18.2 R19.2 R20.2 R21.2 R22.2 R23.2 R24.2 R25.2 R26.2 R27.2 R28.2 R29.2 R30.2 R31.2 R32.2 R33.2 R34.2 R35.2 R36.2 R39.2 R40.2 R43.2 R44.2 R45.2 R46.2 R47.2 R48.2 R49.2 R50.2 R51.2 R52.2 SW1.1 TP11.1
5V_in: C1.2 DD1.13 DD1.14 TP1.1
CS_MEMS_SPI1: DD3.13 DD4.2 | length 7.7
  Top Layer w0.25: DD4.2 50.25,43.784 51,44.534 DD3.13
GND: C2.1 C3.1 C4.2 C5.2 C6.1 C7.1 C8.1 C9.1 C10.1 C11.1 C12.1 DD1.6 DD1.7 DD2.2 DD3.4 DD4.5 DD4.6 DD4.7 DD4.8 DD5.8 R15.1 R16.1 R17.1 R41.1 R42.1 TP3.1 TP6.1 VT1.2 VT2.2 VT3.2 VT4.2 VT5.2 XS1.3 XS1.6
INT1: DD3.11 DD4.12 TP4.1 | length 38.9
  Top Layer w0.25: v1(49.7,45.1) 49.7,45.9 50,46.2 DD3.11 ; TP4.1 v1(50,26.5) ; DD4.12 51.25,40.25 51.5,40.5 v1(51.5,41)
  Bottom Layer w0.25: v1(50,26.5) 50,34.9 52.1,37 52.1,39.57 52.85,40.321 52.85,44.559 49.723,47.686 48.948,47.686 48.5,47.238 48.5,46.3 v1(49.7,45.1) 51.865,42.935 51.865,41.365 v1(51.5,41)
INT2: DD3.14 DD4.11 TP7.1 | length 26.1
  Top Layer w0.25: DD4.11 52.2,39.75 ; DD3.14 51.5,44.5 52.2,43.8 52.2,39.75 ; v1(52.775,39.291) 52.659,39.291 52.2,39.75 ; TP7.1 v1(55,26.5)
  Bottom Layer w0.25: v1(52.775,39.291) 52.775,37.025 55,34.8 v1(55,26.5)
LG1: DD5.15 R9.1 | length 95.9
  Top Layer w0.25: v1(20.95,71.15) R9.1 ; v1(55.5,45.75) 58.5,48.75 DD5.15
  Bottom Layer w0.25: v1(20.95,71.15) 24,68.1 24,41.7 40.4,25.3 55.238,25.3 56.086,26.148 56.086,43.514 55.5,44.1 v1(55.5,45.75)
LG2: DD5.1 R10.1 | length 69.6
  Top Layer w0.25: v1(20.95,41.15) R10.1 ; DD5.1 60.25,47.75 60.75,47.25 v1(60.75,45.75)
  Bottom Layer w0.25: v1(20.95,41.15) 21.5,40.6 23.9,40.6 40.3,24.2 55.542,24.2 56.963,25.621 56.963,41.53 60.708,45.275 60.708,45.708 v1(60.75,45.75)
LG3: DD5.2 R11.1 | length 25.5
  Top Layer w0.25: DD5.2 62.75,48.75 64,47.5 66,47.5 73.5,40 79.95,40 80.95,41 R11.1
LG4: DD5.3 R37.1 | length 36.2
  Top Layer w0.25: DD5.3 62.977,49.25 64.177,48.05 66.05,48.05 80.95,62.95 R37.1
LG5: DD5.4 R38.1 | length 44.7
  Top Layer w0.25: R38.1 62.6,72.65 68.75,66.5 68.75,51.5 65.75,48.5 64.364,48.5 63.114,49.75 DD5.4
M\R\: DD3.15 DD5.10 TP12.1 | length 36.3
  Top Layer w0.25: DD3.15 v1(56.5,48.5) ; v1(57.75,51.5) 58.399,51.5 58.624,51.275 58.825,51.275 DD5.10 ; v1(62.5,66) TP12.1
  Bottom Layer w0.25: v1(56.5,48.5) 56.5,50.25 v1(57.75,51.5) 61.75,55.5 61.8,55.5 66.2,59.9 66.2,67.5 65.3,68.4 63.4,68.4 62.5,67.5 v1(62.5,66)
MISO_SPI2: DD3.9 TP14.1 | length 27.6
  Top Layer w0.25: TP14.1 v1(45,26.5) ; DD3.9 49,47.372 49.3,47.072 v1(49.3,47)
  Bottom Layer w0.25: v1(45,26.5) 45,30.5 49.55,35.05 49.55,35.086 51.65,37.186 51.65,39.757 52.4,40.507 52.4,43.9 v1(49.3,47)
MOSI_SPI2: DD3.10 DD5.14 TP5.1 | length 21.3
  Top Layer w0.25: DD3.10 49.5,48.562 50.025,49.087 v1(50.487,49.087) ; v1(55.5,47.8) 56.8,47.8 58.25,49.25 DD5.14 ; v1(63.5,46.25) TP5.1
  Bottom Layer w0.25: v1(50.487,49.087) 51.775,47.8 v1(55.5,47.8) 61,47.8 62.55,46.25 v1(63.5,46.25)
NetBQ1_3: BQ1.3 C4.1 R2.2 | length 2.9
  Top Layer w0.3: 37.157,53.809 39.959,53.809 R2.2
NetC1_1: C1.1 DD1.1 DD1.2 TP2.1
NetDD3_17: DD3.17 TP23.1 | length 16.5
  Top Layer w0.25: v1(49.6,50.8) 50.15,50.25 50.305,50.25 51.055,49.5 DD3.17 ; TP23.1 v1(55,41.5)
  Bottom Layer w0.25: v1(49.6,50.8) 48.8,50 48.8,49.4 55,43.2 v1(55,41.5)
NetDD3_18: DD3.18 TP22.1 | length 27.2
  Top Layer w0.25: v1(50.7,50.8) 51.5,50 DD3.18 ; v1(65,66) TP22.1
  Bottom Layer w0.25: v1(50.7,50.8) 55.95,50.8 65,59.85 v1(65,66)
NetDD3_22: DD3.22 TP21.1 | length 17.1
  Top Layer w0.25: DD3.22 51.5,53 55,56.5 TP21.1
NetDD3_23: DD3.23 TP20.1 | length 16.2
  Top Layer w0.25: DD3.23 51,53.136 52.5,54.636 TP20.1
NetDD3_24: DD3.24 TP19.1 | length 15.8
  Top Layer w0.25: TP19.1 50,53.604 50.5,53.104 DD3.24
NetDD3_25: DD3.25 TP18.1 | length 16.7
  Top Layer w0.25: TP18.1 49.55,65.45 49.55,53.417 50,52.967 DD3.25
NetDD3_26: DD3.26 TP17.1 | length 17.5
  Top Layer w0.25: TP17.1 49.1,63.4 49.1,53.231 49.5,52.831 DD3.26
NetDD3_27: DD3.27 TP16.1 | length 18.3
  Top Layer w0.25: TP16.1 48.65,61.35 48.65,53.044 49,52.694 DD3.27
NetDD3_28: DD3.28 TP15.1 | length 19.1
  Top Layer w0.25: TP15.1 48.2,59.3 48.2,52.858 48.5,52.558 DD3.28
NetDD5_5: DD5.5 TP25.1 | length 11.7
  Top Layer w0.25: DD5.5 63.25,50.25 64.5,49 65.5,49 67.5,51 TP25.1
NetDD5_6: DD5.6 TP26.1 | length 4.2
  Top Layer w0.25: DD5.6 64.25,50.75 TP26.1
NetDD5_7: DD5.7 TP27.1 | length 7.2
  Top Layer w0.25: DD5.7 64.25,51.25 65,52 TP27.1
NetDD5_9: DD5.9 TP24.1 | length 10.5
  Top Layer w0.25: DD5.9 59.75,52.85 65,58.1 TP24.1
NetDD5_16: DD5.16 SW1.2 | length 7.6
  Top Layer w0.3: SW1.2 DD5.16
NetR3_1: R3.1 VD1.1
NetR4_1: R4.1 VD2.1
NetR5_1: R5.1 VD3.1
NetR6_1: R6.1 VD4.1
NetR7_1: R7.1 VD5.1
NetR8_1: R8.1 VD6.1
NetR9_2: R9.2 R15.2 VT1.1
NetR10_2: R10.2 R16.2 VT2.1
NetR11_2: R11.2 R17.2 VT3.1
NetR12_1: R12.1 VD7.1
NetR13_1: R13.1 VD8.1
NetR14_1: R14.1 VD9.1
NetR18_1: R18.1 VD10.1
NetR19_1: R19.1 VD11.1
NetR20_1: R20.1 VD12.1
NetR21_1: R21.1 VD13.1
NetR22_1: R22.1 VD14.1
NetR23_1: R23.1 VD15.1
NetR24_1: R24.1 VD16.1
NetR25_1: R25.1 VD17.1
NetR26_1: R26.1 VD18.1
NetR27_1: R27.1 VD19.1
NetR28_1: R28.1 VD20.1
NetR29_1: R29.1 VD21.1
NetR30_1: R30.1 VD22.1
NetR31_1: R31.1 VD23.1
NetR32_1: R32.1 VD24.1
NetR33_1: R33.1 VD25.1
NetR34_1: R34.1 VD26.1
NetR35_1: R35.1 VD27.1
NetR36_1: R36.1 VD28.1
NetR37_2: R37.2 R41.2 VT4.1
NetR38_2: R38.2 R42.2 VT5.1
NetR39_1: R39.1 VD29.1
NetR40_1: R40.1 VD30.1
NetR43_1: R43.1 VD31.1
NetR44_1: R44.1 VD32.1
NetR45_1: R45.1 VD33.1
NetR46_1: R46.1 VD34.1
NetR47_1: R47.1 VD35.1
NetR48_1: R48.1 VD36.1
NetR49_1: R49.1 VD37.1
NetR50_1: R50.1 VD38.1
NetR51_1: R51.1 VD39.1
NetR52_1: R52.1 VD40.1
NetVD1_2: VD1.2 VD4.2 VD7.2 VD10.2 VD13.2 VD16.2 VD19.2 VD22.2 VT1.3
NetVD2_2: VD2.2 VD5.2 VD8.2 VD11.2 VD14.2 VD17.2 VD20.2 VD23.2 VT2.3
NetVD3_2: VD3.2 VD6.2 VD9.2 VD12.2 VD15.2 VD18.2 VD21.2 VD24.2 VT3.3
NetVD25_2: VD25.2 VD27.2 VD29.2 VD31.2 VD33.2 VD35.2 VD37.2 VD39.2 VT4.3
NetVD26_2: VD26.2 VD28.2 VD30.2 VD32.2 VD34.2 VD36.2 VD38.2 VD40.2 VT5.3
NRST: C3.2 DD3.5 R1.1 XS1.5 | length 33.8
  Top Layer w0.25: v1(45,49.5) DD3.5 ; v1(45.85,57.75) C3.2 ; v1(56.95,57.75) 57.8,56.9 60.17,56.9 XS1.5
  Top Layer w0.3: R1.1 C3.2
  Bottom Layer w0.25: v1(45,49.5) 45,56.9 v1(45.85,57.75) v1(56.95,57.75)
O\E\: DD3.16 DD5.13 TP10.1 | length 7.3
  Top Layer w0.25: DD3.16 56.045,49 56.312,49.266 57.203,49.266 57.687,49.75 DD5.13
OSC_IN: BQ1.1 C5.1 DD3.1 | length 16
  Top Layer w0.25: BQ1.1 34.475,55.75 34.475,55.646 35.121,55 43.25,55 46.75,51.5 DD3.1
OSC_OUT: DD3.2 R2.1 | length 8
  Top Layer w0.25: R2.1 43.65,53.85 46.5,51 DD3.2
SCK__SPI2: DD3.6 DD5.12 TP8.1 | length 11.2
  Top Layer w0.25: DD3.6 48.9,49 v1(49.6,49.7) ; v1(55.811,49.797) 57.065,49.797 57.518,50.25 DD5.12
  Bottom Layer w0.25: v1(49.6,49.7) 49.686,49.786 49.961,49.786 49.971,49.797 v1(55.811,49.797)
SCL_MEMS_SPI1: DD3.7 DD4.1 | length 9.6
  Top Layer w0.25: v1(47.5,46.25) 47.5,48.005 47.995,48.5 DD3.7 ; DD4.1 50.75,41.25 51,41.5 v1(51,42.75)
  Bottom Layer w0.25: v1(47.5,46.25) v1(51,42.75)
SDI_MEMS_SPI1: DD3.8 DD4.4 | length 7.7
  Top Layer w0.25: DD3.8 48.5,44.75 49.25,44 DD4.4
SDO_MEMS_SPI1: DD3.12 DD4.3 | length 7.7
  Top Layer w0.25: DD4.3 49.75,44.006 50.5,44.756 DD3.12
SHCP: DD3.19 DD5.11 TP13.1 | length 7.1
  Top Layer w0.25: DD3.19 57.1,50.5 57.35,50.75 DD5.11
SWCLK: DD3.21 XS1.2 | length 12.1
  Top Layer w0.25: DD3.21 52.75,51.5 55.75,54.5 55.75,58 57.02,59.27 XS1.2
SWDIO: DD3.20 XS1.4 | length 20
  Top Layer w0.25: DD3.20 56.2,51 62.75,57.55 62.75,60 62.25,60.5 60.463,60.5 60,60.037 XS1.4
pads on no net: BQ1.2 BQ1.4 DD2. DD2.4

## Polygon pours and split planes (outlines as drawn)
NetR9_2 on Top Layer "NETR9_2_L01_P019" (solid, remove dead copper, pour order 19): 18.05,78.003 cw(c18.548,78.002) 18.548,78.5 19.55,78.5 cw(c19.55,78) 20.05,78 20.05,76.5 ccw(c20.55,76.5) 20.55,76 21.55,76 cw(c21.55,75.5) 22.05,75.5 22.05,73.247 18.05,73.247
NetR10_2 on Top Layer "NETR10_2_L01_P018" (solid, remove dead copper, pour order 18): 18,48.003 cw(c18.498,48.002) 18.498,48.5 19.5,48.5 cw(c19.5,48) 20,48 20,46.5 ccw(c20.5,46.5) 20.5,46 21.5,46 cw(c21.5,45.5) 22,45.5 22,43.247 18,43.247
NetR11_2 on Top Layer "NETR11_2_L01_P017" (solid, remove dead copper, pour order 17): 78,48.003 cw(c78.498,48.002) 78.498,48.5 79.5,48.5 cw(c79.5,48) 80,48 80,46.5 ccw(c80.5,46.5) 80.5,46 81.5,46 cw(c81.5,45.5) 82,45.5 82,43.247 78,43.247
NetR37_2 on Top Layer "NETR37_2_L01_P016" (solid, remove dead copper, pour order 16): 78,78.003 cw(c78.498,78.002) 78.498,78.5 79.5,78.5 cw(c79.5,78) 80,78 80,76.5 ccw(c80.5,76.5) 80.5,76 81.5,76 cw(c81.5,75.5) 82,75.5 82,73.247 78,73.247
NetR38_2 on Top Layer "NETR38_2_L01_P015" (solid, remove dead copper, pour order 15): 48,78.003 cw(c48.498,78.002) 48.498,78.5 49.5,78.5 cw(c49.5,78) 50,78 50,76.5 ccw(c50.5,76.5) 50.5,76 51.5,76 cw(c51.5,75.5) 52,75.5 52,73.247 48,73.247
3V3 on Top Layer (solid, remove dead copper, pour order 14): 35,40.248 42.5,40.248 42.502,40.25 43.75,40.25 43.75,33.678 56.25,33.678 56.25,36.25 59.151,36.25 59.151,41.75 57.5,41.75 57.5,37.5 50.85,37.5 50.85,39.5 50.148,39.5 50.148,37.5 46.25,37.5 46.25,42.5 42.5,42.5 42.5,52 41.196,52 41.196,46.25 35,46.25
5V on Top Layer (solid, remove dead copper, pour order 12): 62,27.75 62,41.75 60.39,41.75 60.39,31.75 33.803,31.75 33.803,39.5 33,39.5 33,40.5 33.803,40.5 33.803,41.75 30,41.75 30,39.75 28,39.75 28,31.75 26.5,31.75 26.5,27.75 33.803,27.75
NetBQ1_3 on Top Layer "NETBQ1_3_L01_P006" (solid, remove dead copper, pour order 6): 37.5,50 34.951,50 34.951,53.962 37.5,53.962
OSC_IN on Top Layer "OSC_IN_L01_P005" (solid, remove dead copper, pour order 5): 32.5,60 35.049,60 35.049,56.045 32.5,56.045
GND on Top Layer "GND_L01_P003" (solid, remove dead copper, pour order 3): 34.25,27.25 26.5,27.25 26.5,23.25 34.25,23.25
5V_in on Top Layer "5V_IN_L01_P001" (solid, remove dead copper, pour order 1): 15.75,27.75 23.5,27.75 23.5,31.75 15.75,31.75
NetC1_1 on Top Layer "NETC1_1_L01_P000" (solid, remove dead copper, pour order 0): 15.75,27.25 23.5,27.25 23.5,23.25 15.75,23.25

## Silkscreen, mask and mechanical layers (free items; w line width, h text height)
Board:
  the board outline again, w0.1